# EAGLE board robot_general_purpose_board (EAGLE 7.1.0)

Size 107.62 x 80 mm. Coordinates in mm from the lower left corner, seen from the top.
Outline: 0,0 107.62,0 107.62,80 0,80 0,0
Copper layers (1*16): Top 0.035mm / dielectric 1.5mm / Bottom 0.035mm
Design rules "default *": minimum track width 30mil, minimum drill 24mil, track to track 8mil, track to pad 8mil, pad to pad 8mil, via to via 8mil, smd to smd 8mil, copper to edge 40mil, drill to drill 8mil, minimum pad ring 10mil, minimum via ring 8mil, stop-mask expansion 4mil, vias tented up to drill 0mil, thermal gap 10mil

## Footprints (pad centres in the part's own frame; a part is rotated, then mirrored left to right if it is on the bottom)
LED5MM = drill 0.813 octagon: A -1.27,0; K 1.27,0
C2.5-2 = drill 0.813 pad 1.6 octagon: 1 -1.27,0; 2 1.27,0
DO41-10 = drill 1.118: A 5.08,0; C -5.08,0
DIL28-3 = drill 0.813 long: 1 -16.51,-3.81; 2 -13.97,-3.81; 3 -11.43,-3.81; 4 -8.89,-3.81; 5 -6.35,-3.81; 6 -3.81,-3.81; 7 -1.27,-3.81; 8 1.27,-3.81; 9 3.81,-3.81; 10 6.35,-3.81; 11 8.89,-3.81; 12 11.43,-3.81; 13 13.97,-3.81; 14 16.51,-3.81; 15 16.51,3.81; 16 13.97,3.81; 17 11.43,3.81; 18 8.89,3.81; 19 6.35,3.81; 20 3.81,3.81; 21 1.27,3.81; 22 -1.27,3.81; 23 -3.81,3.81; 24 -6.35,3.81; 25 -8.89,3.81; 26 -11.43,3.81; 27 -13.97,3.81; 28 -16.51,3.81
TO220V = drill 1.016 long: 1 -2.54,-2.54; 2 0,-2.54; 3 2.54,-2.54
DIL16 = drill 0.813 long: 1 -8.89,-3.81; 2 -6.35,-3.81; 3 -3.81,-3.81; 4 -1.27,-3.81; 5 1.27,-3.81; 6 3.81,-3.81; 7 6.35,-3.81; 8 8.89,-3.81; 9 8.89,3.81; 10 6.35,3.81; 11 3.81,3.81; 12 1.27,3.81; 13 -1.27,3.81; 14 -3.81,3.81; 15 -6.35,3.81; 16 -8.89,3.81
DIL-08 = drill 0.813 long: 1 -3.81,-3.81; 2 -1.27,-3.81; 3 1.27,-3.81; 4 3.81,-3.81; 5 3.81,3.81; 6 1.27,3.81; 7 -1.27,3.81; 8 -3.81,3.81
DCJ0303 = drill 1 pad 2 long: 1 0,3.1; 2 4.8,0; 3 0,-3
JP1 = drill 0.914 long: 1 0,-1.27; 2 0,1.27
JP2 = drill 0.914 long: 1 -2.54,0; 2 0,0; 3 2.54,0
LED3MM = drill 0.813 octagon: A -1.27,0; K 1.27,0
JP4 = drill 0.914 long: 1 -3.81,0; 2 -1.27,0; 3 1.27,0; 4 3.81,0
HC49/S = drill 0.813: 1 -2.413,0; 2 2.413,0
0207/10 = drill 0.813 octagon: 1 -5.08,0; 2 5.08,0
0204/7 = drill 0.813 octagon: 1 -3.81,0; 2 3.81,0
DP-02 = drill 0.813 long: 1 -2.54,-2.54; 2 2.54,-2.54; 3 2.54,3.81; 4 -2.54,3.81
RTRIM64P = drill 0.61: 1 -2.54,-3.81; 2 7.62,0; 3 -2.54,2.54

## Placement (x,y rotation side)
BLACK  5mm  [LED5MM]  95.25,16.51 0 top
BLACK1  5mm  [LED5MM]  100.33,64.77 90 top
C1  22pf  [C2.5-2]  38.1,30.48 0 top
C2  22pf  [C2.5-2]  44.45,30.48 180 top
C3  100UF  [C2.5-2]  39.37,25.4 0 top
C4  0.1uf  [C2.5-2]  12.7,33.02 180 top
C5  0.1uf  [C2.5-2]  5.08,40.64 0 top
C6  4.7uf  [C2.5-2]  5.08,33.02 0 top
D1  1N4007  [DO41-10]  6.35,17.78 180 top
D2  1N4007  [DO41-10]  29.21,21.59 180 top
IC1  ATMEGA328  [DIL28-3]  35.56,45.72 0 top
IC2  7805  [TO220V]  6.35,24.13 180 top
IC3  L293D  [DIL16]  69.85,45.72 180 top
IC4  358  [DIL-08]  69.85,8.89 270 top
IC5  358  [DIL-08]  63.5,72.39 90 top
J1  [DCJ0303]  5.08,10.16 0 top
JP1  [JP1]  19.05,21.59 90 top
JP2  [JP1]  67.31,55.88 90 top
JP3  0volt  [JP2]  13.97,38.1 180 top
JP4  [JP1]  67.31,36.83 90 top
JP7  +5v0lt  [JP2]  22.86,33.02 0 top
JP9  +12volt  [JP2]  22.86,29.21 180 top
LED1  [LED3MM]  13.97,52.07 0 top
LED2  [LED3MM]  33.02,59.69 180 top
LED3  5mm  [LED5MM]  92.71,57.15 90 top
LED4  5mm  [LED5MM]  87.63,20.32 0 top
PROGRAMMINGPORT  [JP4]  24.13,38.1 180 top
Q1  16MHZ  [HC49/S]  40.64,36.83 180 top
R1  220R  [0207/10]  7.62,58.42 180 top
R2  330R  [0207/10]  44.45,59.69 0 top
R3  1K  [0204/7]  62.23,26.67 0 top
R4  10K  [0207/10]  2.54,50.8 90 top
R5  1K  [0204/7]  78.74,22.86 270 top
R6  10K  [0204/7]  74.93,22.86 90 top
R7  1K  [0204/7]  62.23,30.48 0 top
R8  1K  [0204/7]  88.9,68.58 90 top
R9  10K  [0204/7]  63.5,63.5 0 top
S1  [DP-02]  22.86,57.15 0 top
VR  50k  [RTRIM64P]  57.15,6.35 90 top
VR1  100E  [RTRIM64P]  81.28,10.16 270 top
VR2  50k  [RTRIM64P]  78.74,73.66 180 top
VR3  100E  [RTRIM64P]  81.28,58.42 90 top
WHITE  5mm  [LED5MM]  95.25,7.62 270 top
WHITE1  5mm  [LED5MM]  95.25,74.93 270 top

## Library data of the parts
BLACK BLACK1 LED1-LED4 WHITE WHITE1 = led
C1-C6 = capacitor-wima
D1 D2 = diode
IC1 = quantum-research-group; OC_FARNELL: unknown; OC_NEWARK: unknown
IC2 = linear
IC3 = st-microelectronics; MPN: L293D; OC_FARNELL: 9589619; OC_NEWARK: 56P8249
IC4 IC5 = st-microelectronics; MF: Arrow Electronics; MPN: NE555N; OC_FARNELL: 1467742; OC_NEWARK: 89K1486
J1 = con-jack; OC_FARNELL: unknown; OC_NEWARK: unknown
JP1-JP4 JP7 JP9 PROGRAMMINGPORT = jumper
Q1 = crystal; OC_FARNELL: 1667008; OC_NEWARK: unknown
R1-R9 = rcl
S1 = switch-dil; MPN: MCDP02; OC_FARNELL: 1255233; OC_NEWARK: 26M1095
VR VR1-VR3 = resistor

## Nets
+5V: C5.1 C6.1 IC1.7 IC1.20 IC2.3 IC3.1 IC3.9 IC3.16 IC4.8 IC5.8 JP7.1 JP7.2 JP7.3 R1.2 R4.2 R5.1 R6.1 R8.1 R9.1 VR1.3 VR3.3
+12V: C3.1 C4.1 D1.C IC2.1 JP1.2 JP9.1 JP9.2 JP9.3
GND: BLACK1.K BLACK.K C1.1 C2.1 C3.2 C4.2 C5.2 C6.2 IC1.8 IC1.22 IC2.2 IC3.4 IC3.5 IC3.12 IC3.13 IC4.4 IC5.4 J1.2 J1.3 JP3.1 JP3.2 JP3.3 LED1.K LED2.K LED3.K LED4.K PROGRAMMINGPORT.2 S1.4 VR2.1 VR.1 WHITE1.K WHITE.K
N$1: C1.2 IC1.9 Q1.2
N$2: C2.2 IC1.10 Q1.1
N$3: D1.A J1.1
N$5: LED2.A R2.1
N$6: LED1.A R1.1
N$7: D2.C IC3.8
N$8: IC1.28
N$9: IC1.27
N$10: IC1.26
N$11: IC1.25
N$12: IC1.24
N$13: IC1.23
N$14: D2.A JP1.1
N$15: IC3.14 JP4.1
N$16: IC3.11 JP4.2
N$17: IC3.3 JP2.1
N$18: IC3.6 JP2.2
N$19: IC1.2 PROGRAMMINGPORT.4
N$20: IC1.13 IC4.1 R3.1
N$21: R5.2 WHITE.A
N$22: BLACK.A IC4.2 R6.2
N$23: IC1.15 IC3.15
N$24: IC1.16 IC3.10
N$25: IC1.17 IC3.7
N$26: IC1.18 IC3.2
N$27: IC1.19 R2.2
N$28: IC4.3 VR.2
N$29: VR1.2 VR.3
N$30: IC1.3 PROGRAMMINGPORT.3
N$31: IC1.1 R4.1 S1.2
N$32: LED3.A R3.2
N$34: IC1.14 IC5.1 R7.1
N$35: R8.2 WHITE1.A
N$36: BLACK1.A IC5.2 R9.2
N$37: IC5.3 VR2.2
N$38: VR2.3 VR3.2
N$40: LED4.A R7.2

## Tracks (layer width: path | path; a pad name or v marks a point on that pad's centre or on a via)
+5V  (20 unrouted)
+12V  (7 unrouted)
GND  (31 unrouted)
N$1  (2 unrouted)
N$2  (2 unrouted)
N$3  (1 unrouted)
N$5  (1 unrouted)
N$6  (1 unrouted)
N$7  (1 unrouted)
N$14  (1 unrouted)
N$15  (1 unrouted)
N$16  (1 unrouted)
N$17  (1 unrouted)
N$18  (1 unrouted)
N$19  (1 unrouted)
N$20  (2 unrouted)
N$21  (1 unrouted)
N$22  (2 unrouted)
N$23  (1 unrouted)
N$24  (1 unrouted)
N$25  (1 unrouted)
N$26  (1 unrouted)
N$27  (1 unrouted)
N$28  (1 unrouted)
N$29  (1 unrouted)
N$30  (1 unrouted)
N$31  (2 unrouted)
N$32  (1 unrouted)
N$34  (2 unrouted)
N$35  (1 unrouted)
N$36  (2 unrouted)
N$37  (1 unrouted)
N$38  (1 unrouted)
N$40  (1 unrouted)